# EAGLE board touch_RevA (EAGLE 6.5.0)
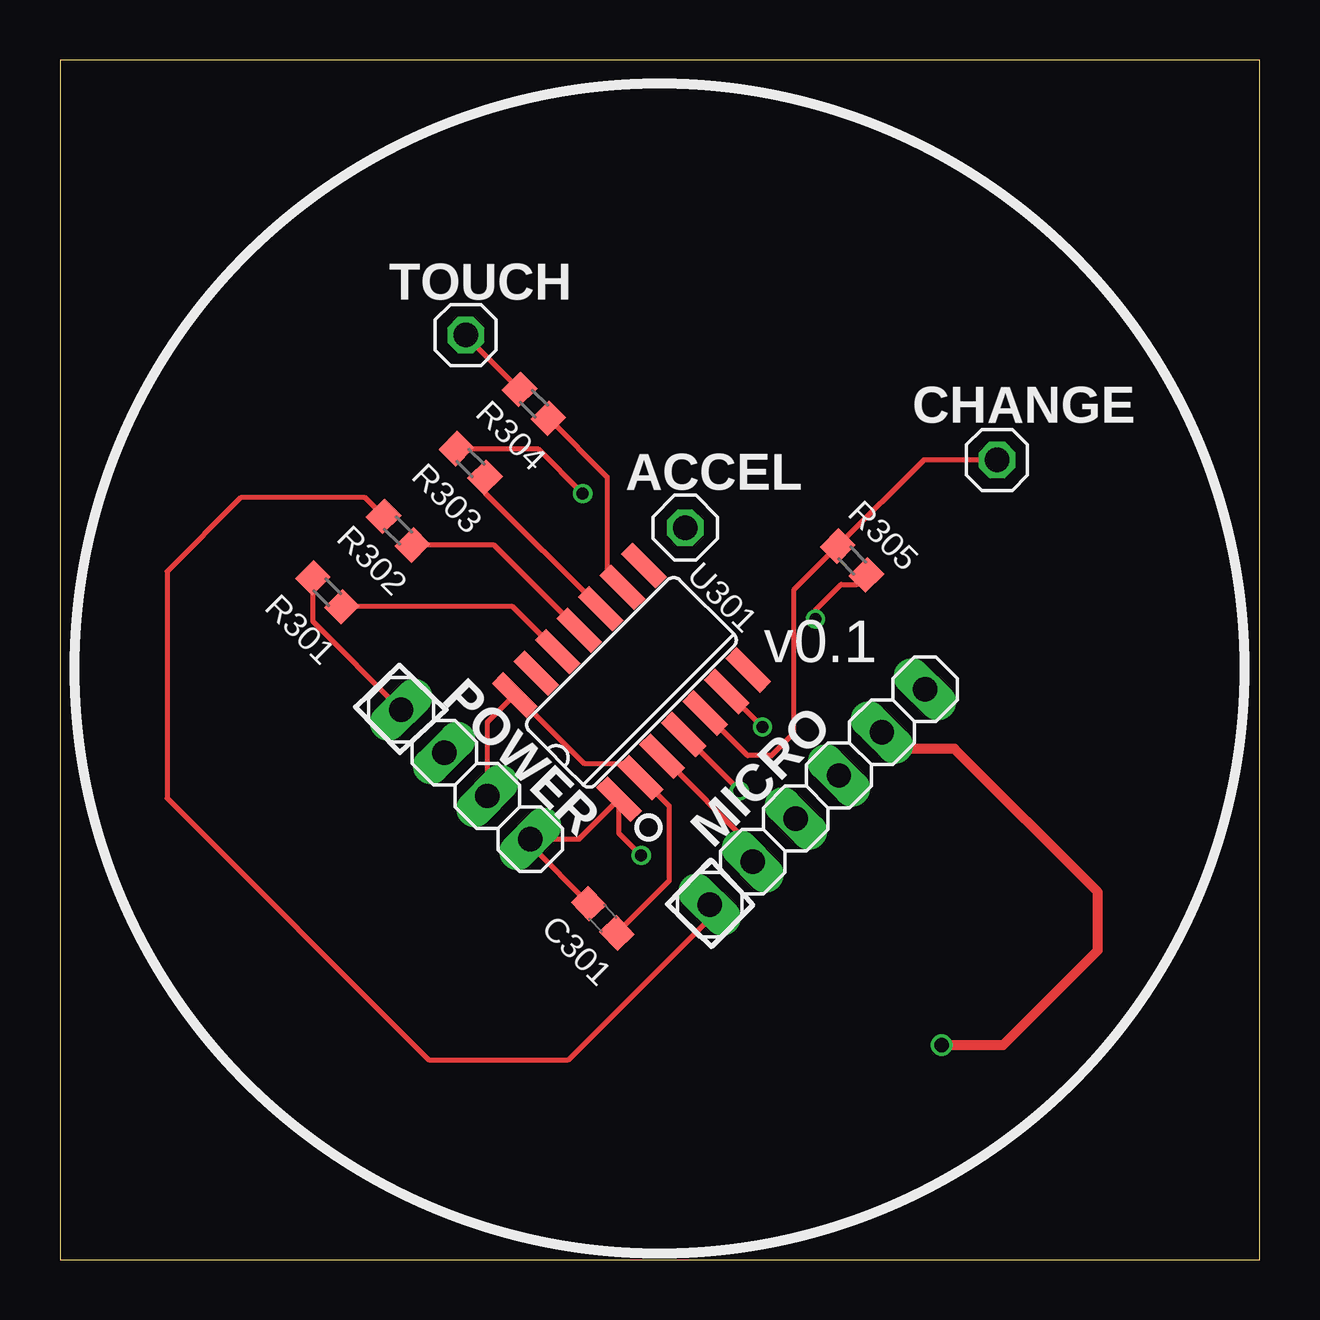
[diagram p0: board, top side]
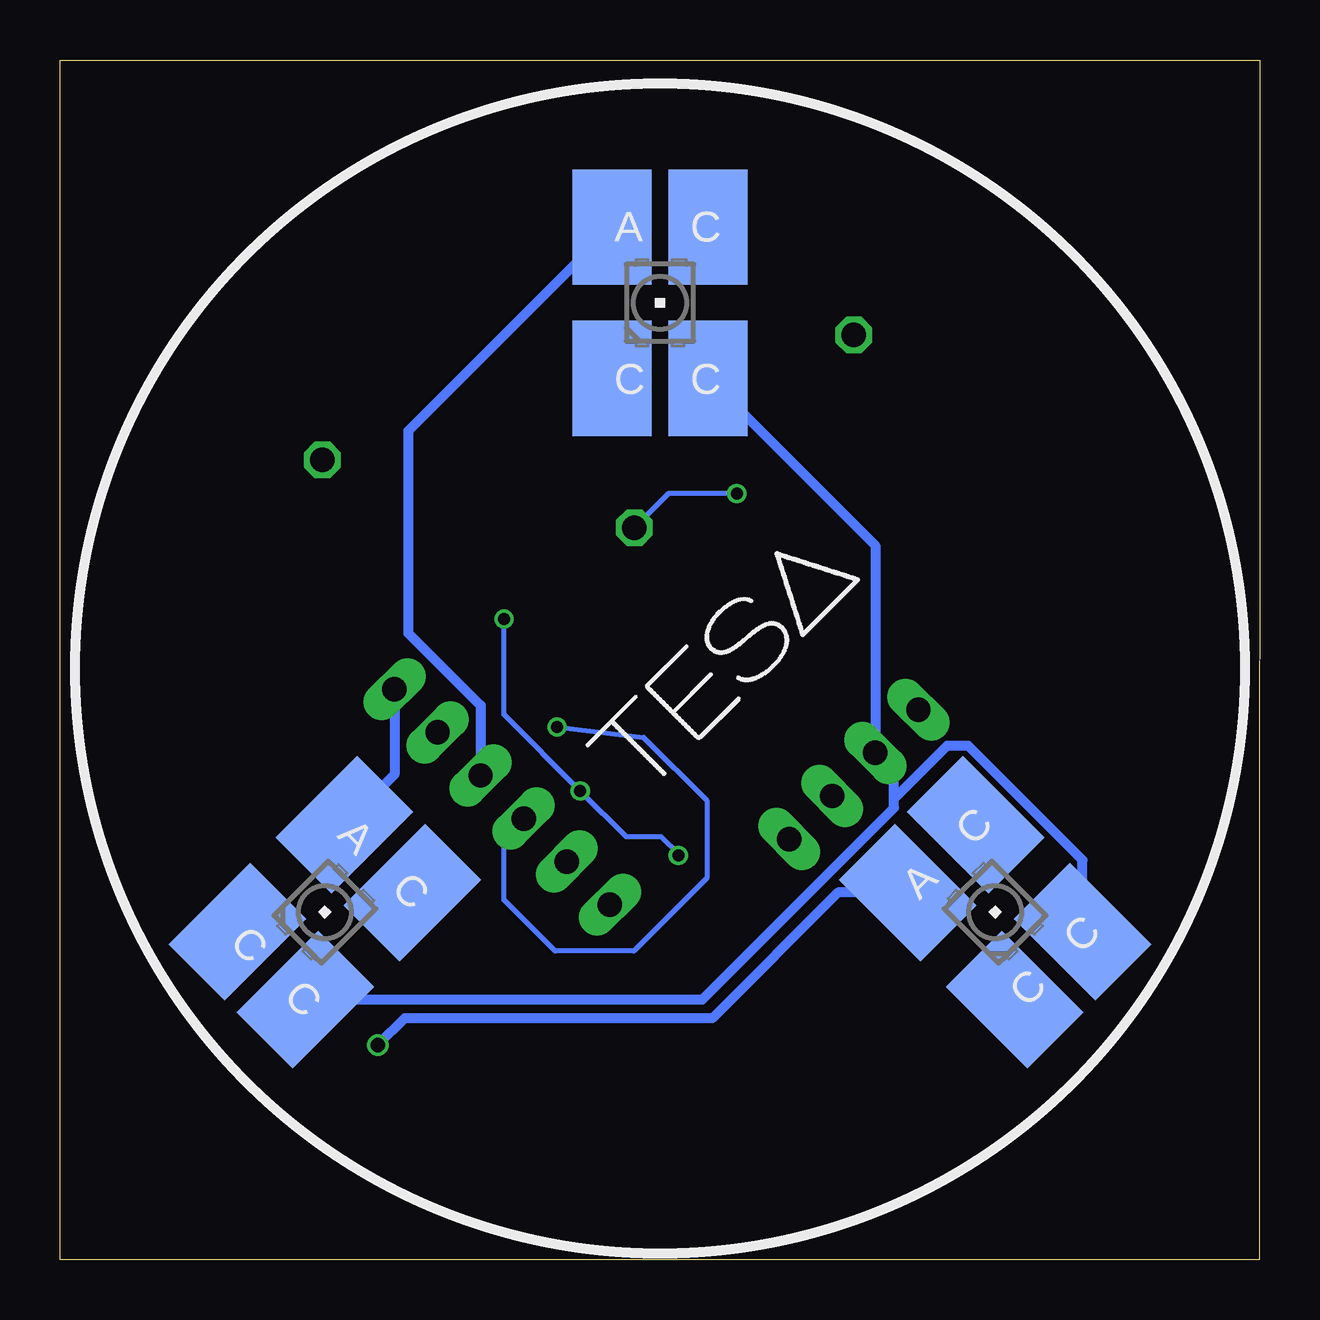
[diagram p1: board, bottom side, seen from below]

Size 50 x 50 mm. Coordinates in mm from the lower left corner, seen from the top.
Outline: 0,0 50,0 50,50 0,50 0,0
Copper layers (1*16): Top 0.035mm / dielectric 1.5mm / Bottom 0.035mm
Design rules "ITEADstudio_DRC": minimum track width 6mil, minimum drill 12mil, track to track 6mil, track to pad 6mil, pad to pad 6mil, via to via 6mil, smd to smd 0mil, copper to edge 10mil, drill to drill 10mil, minimum pad ring 10mil, minimum via ring 6mil, stop-mask expansion 2mil, vias tented up to drill 100mil, thermal gap 10mil

## Footprints (pad centres in the part's own frame; a part is rotated, then mirrored left to right if it is on the bottom)
1X01 = drill 1.016 octagon: 1 0,0
C0603 = smd 1.1 x 1: 1 -0.85,0; 2 0.85,0
SO14 = smd 0.66 x 2.032: 1 -3.81,-3.073; 2 -2.54,-3.073; 3 -1.27,-3.073; 4 0,-3.073; 5 1.27,-3.073; 6 2.54,-3.073; 7 3.81,-3.073; 8 3.81,3.073; 9 2.54,3.073; 10 1.27,3.073; 11 0,3.073; 12 -1.27,3.073; 13 -2.54,3.073; 14 -3.81,3.073
P-LCC-4 = smd 3.3 x 4.8: A -2,3.15; C@1 -2,-3.15; C@3 2,3.15; C@4 2,-3.15
1X06 = drill 1.016 long: 1 -6.35,0; 2 -3.81,0; 3 -1.27,0; 4 1.27,0; 5 3.81,0; 6 6.35,0
1X04 = drill 1.016 long: 1 -3.81,0; 2 -1.27,0; 3 1.27,0; 4 3.81,0
R0603 = smd 1 x 1.1: 1 -0.85,0; 2 0.85,0

## Placement (x,y rotation side)
ACCEL  [1X01]  26.06,30.51 225 top
C1  0.1u  [C0603]  22.63,14.23 313.8 top
CHANGE_PIN  [1X01]  39.06,33.33 0 top
IC1  AT42QT1070-SSU  [SO14]  23.82,24.06 45 top
LED1  [P-LCC-4]  24.99,39.88 0 bottom
LED2  [P-LCC-4]  11.02,14.48 45 bottom
LED3  [P-LCC-4]  38.96,14.48 315 bottom
MICRO  [1X06]  31.57,19.28 45 top
PWR  [1X04]  16.91,20.22 315 top
R1  20k  [R0603]  11.15,27.82 135 top
R2  20k  [R0603]  14.09,30.38 135 top
R3  20k  [R0603]  17.12,33.2 135 top
R4  20k  [R0603]  19.76,35.66 135 top
R5  20k  [R0603]  33.02,29.14 315 top
TO_TOUCH  [1X01]  16.91,38.53 0 top

## Library data of the parts
ACCEL CHANGE_PIN MICRO PWR TO_TOUCH = pinhead
C1 = eagle-ltspice; SPICEMODEL: NONE; SPICEPREFIX: C
IC1 = adafruit
LED1-LED3 = led
R1-R5 = eagle-ltspice; SPICEMODEL: NONE; SPICEPREFIX: R

## Nets
CHANGE: CHANGE_PIN.1 IC1.5 R5.1
GND: C1.2 IC1.2 IC1.14 PWR.3
LED1: LED1.A MICRO.4
LED2: LED2.A MICRO.5
LED3: LED3.A MICRO.6
N$7: IC1.12 R1.1
N$8: IC1.11 R2.1
N$9: IC1.10 R3.1
N$10: IC1.9 R4.1
SCL: IC1.6 MICRO.3
SDA: IC1.3 MICRO.2
TOUCH1: PWR.1 R1.2
TOUCH2: MICRO.1 R2.2
TOUCH3: ACCEL.1 R3.2
TOUCH4: R4.2 TO_TOUCH.1
VCC: C1.1 IC1.1 IC1.4 PWR.4 R5.2
VDD: LED1.C@4 LED2.C@4 LED3.C@4 PWR.2

## Tracks (layer width: path | path; a pad name or v marks a point on that pad's centre or on a via)
CHANGE
  Top 0.203: IC1.5 28.67,21.01 29.66,21.01 30.58,21.92 30.58,27.9 R5.1 36.01,33.33 CHANGE_PIN.1
GND
  Top 0.203: C1.2 25.4,15.79 25.4,18.89 IC1.2 23.61,20.68 21.84,20.68 18.98,23.54 IC1.14 17.81,22.39 PWR.3
LED1
  Bottom 0.406: LED1.A 35.48,34.54 35.48,26.11 32.47,23.1 MICRO.4
LED2  (via drill 0.6 pad 0.2)
  Top 0.406: v36.75,8.94 39.32,8.94 43.25,12.88 43.25,15.32 37.28,21.29 35,21.29 34.31,21.98 MICRO.5
  Bottom 0.406: LED2.A 17.57,15.29 22.81,10.06 35.63,10.06 v36.75,8.94
LED3
  Bottom 0.406: MICRO.6 36.06,20.21 LED3.A
N$7
  Top 0.203: IC1.12 18.87,27.22 R1.1
N$8
  Top 0.203: IC1.11 18.1,29.78 R2.1
N$9
  Top 0.203: R3.1 17.72,31.96 IC1.10
N$10
  Top 0.203: R4.1 22.81,32.62 22.81,28.67 IC1.9
SCL  (via drill 0.5 pad 0.2)
  Top 0.203: IC1.6 27.79,23.67 v29.28,22.2
  Bottom 0.203: v29.28,22.2 25.68,21.77 23.03,19.13 23.03,15.9 26.08,12.86 29.36,12.86 31.49,14.99 31.49,17.56 MICRO.3
SDA
  Top 0.203: MICRO.2 28.88,17.21 IC1.3
TOUCH1
  Top 0.203: PWR.1 10.55,26.59 R1.2
TOUCH2
  Top 0.203: R2.2 12.72,31.75 7.54,31.75 4.47,28.68 4.47,19.23 15.36,8.33 21.2,8.33 27.08,14.21 MICRO.1
TOUCH3  (via drill 0.5 pad 0.2)
  Top 0.203: R3.2 19.92,33.8 v21.79,31.93
  Bottom 0.203: v21.79,31.93 24.63,31.93 ACCEL.1
TOUCH4
  Top 0.203: TO_TOUCH.1 16.91,38.51 R4.2
VCC  (via drill 0.5 pad 0.2)
  Top 0.203: C1.1 19.61,17.27 PWR.4 21.64,17.53 IC1.1 23.3,17.77 v24.23,16.84 | IC1.4 28.32,19.56 v28.32,19.54 | v31.49,26.7 31.49,27.08 32.56,28.15 33.23,28.15 R5.2
  Bottom 0.203: v24.23,16.84 24.23,16.92 24.94,17.63 26.41,17.63 v28.32,19.54 31.49,22.71 v31.49,26.7
VDD
  Bottom 0.406: LED3.C@4 23.22,10.84 15.24,18.82 15.24,19.21 | 15.24,19.21 15.24,20.34 PWR.2 16.02,29.76 LED1.C@4 | LED2.C@4 7.38,16.66 12.14,21.42 13.03,21.42 15.24,19.21

## Text on the board
tPlace: TOUCH | CHANGE | R304 | ACCEL | R303 | R305 | R302 | U301 | R301 | v0.1 | POWER | MICRO | C301